# Altium PCB PCB7_main_board.PcbDoc (part 3 of 3)
Units mm, origin at the board's own origin, x right, y up, seen from the top; angles counter-clockwise.
Board outline 169 x 112 mm, 2 copper layers (Top Layer, Bottom Layer); 275 components, 203 nets, 880 pads, 376 vias.
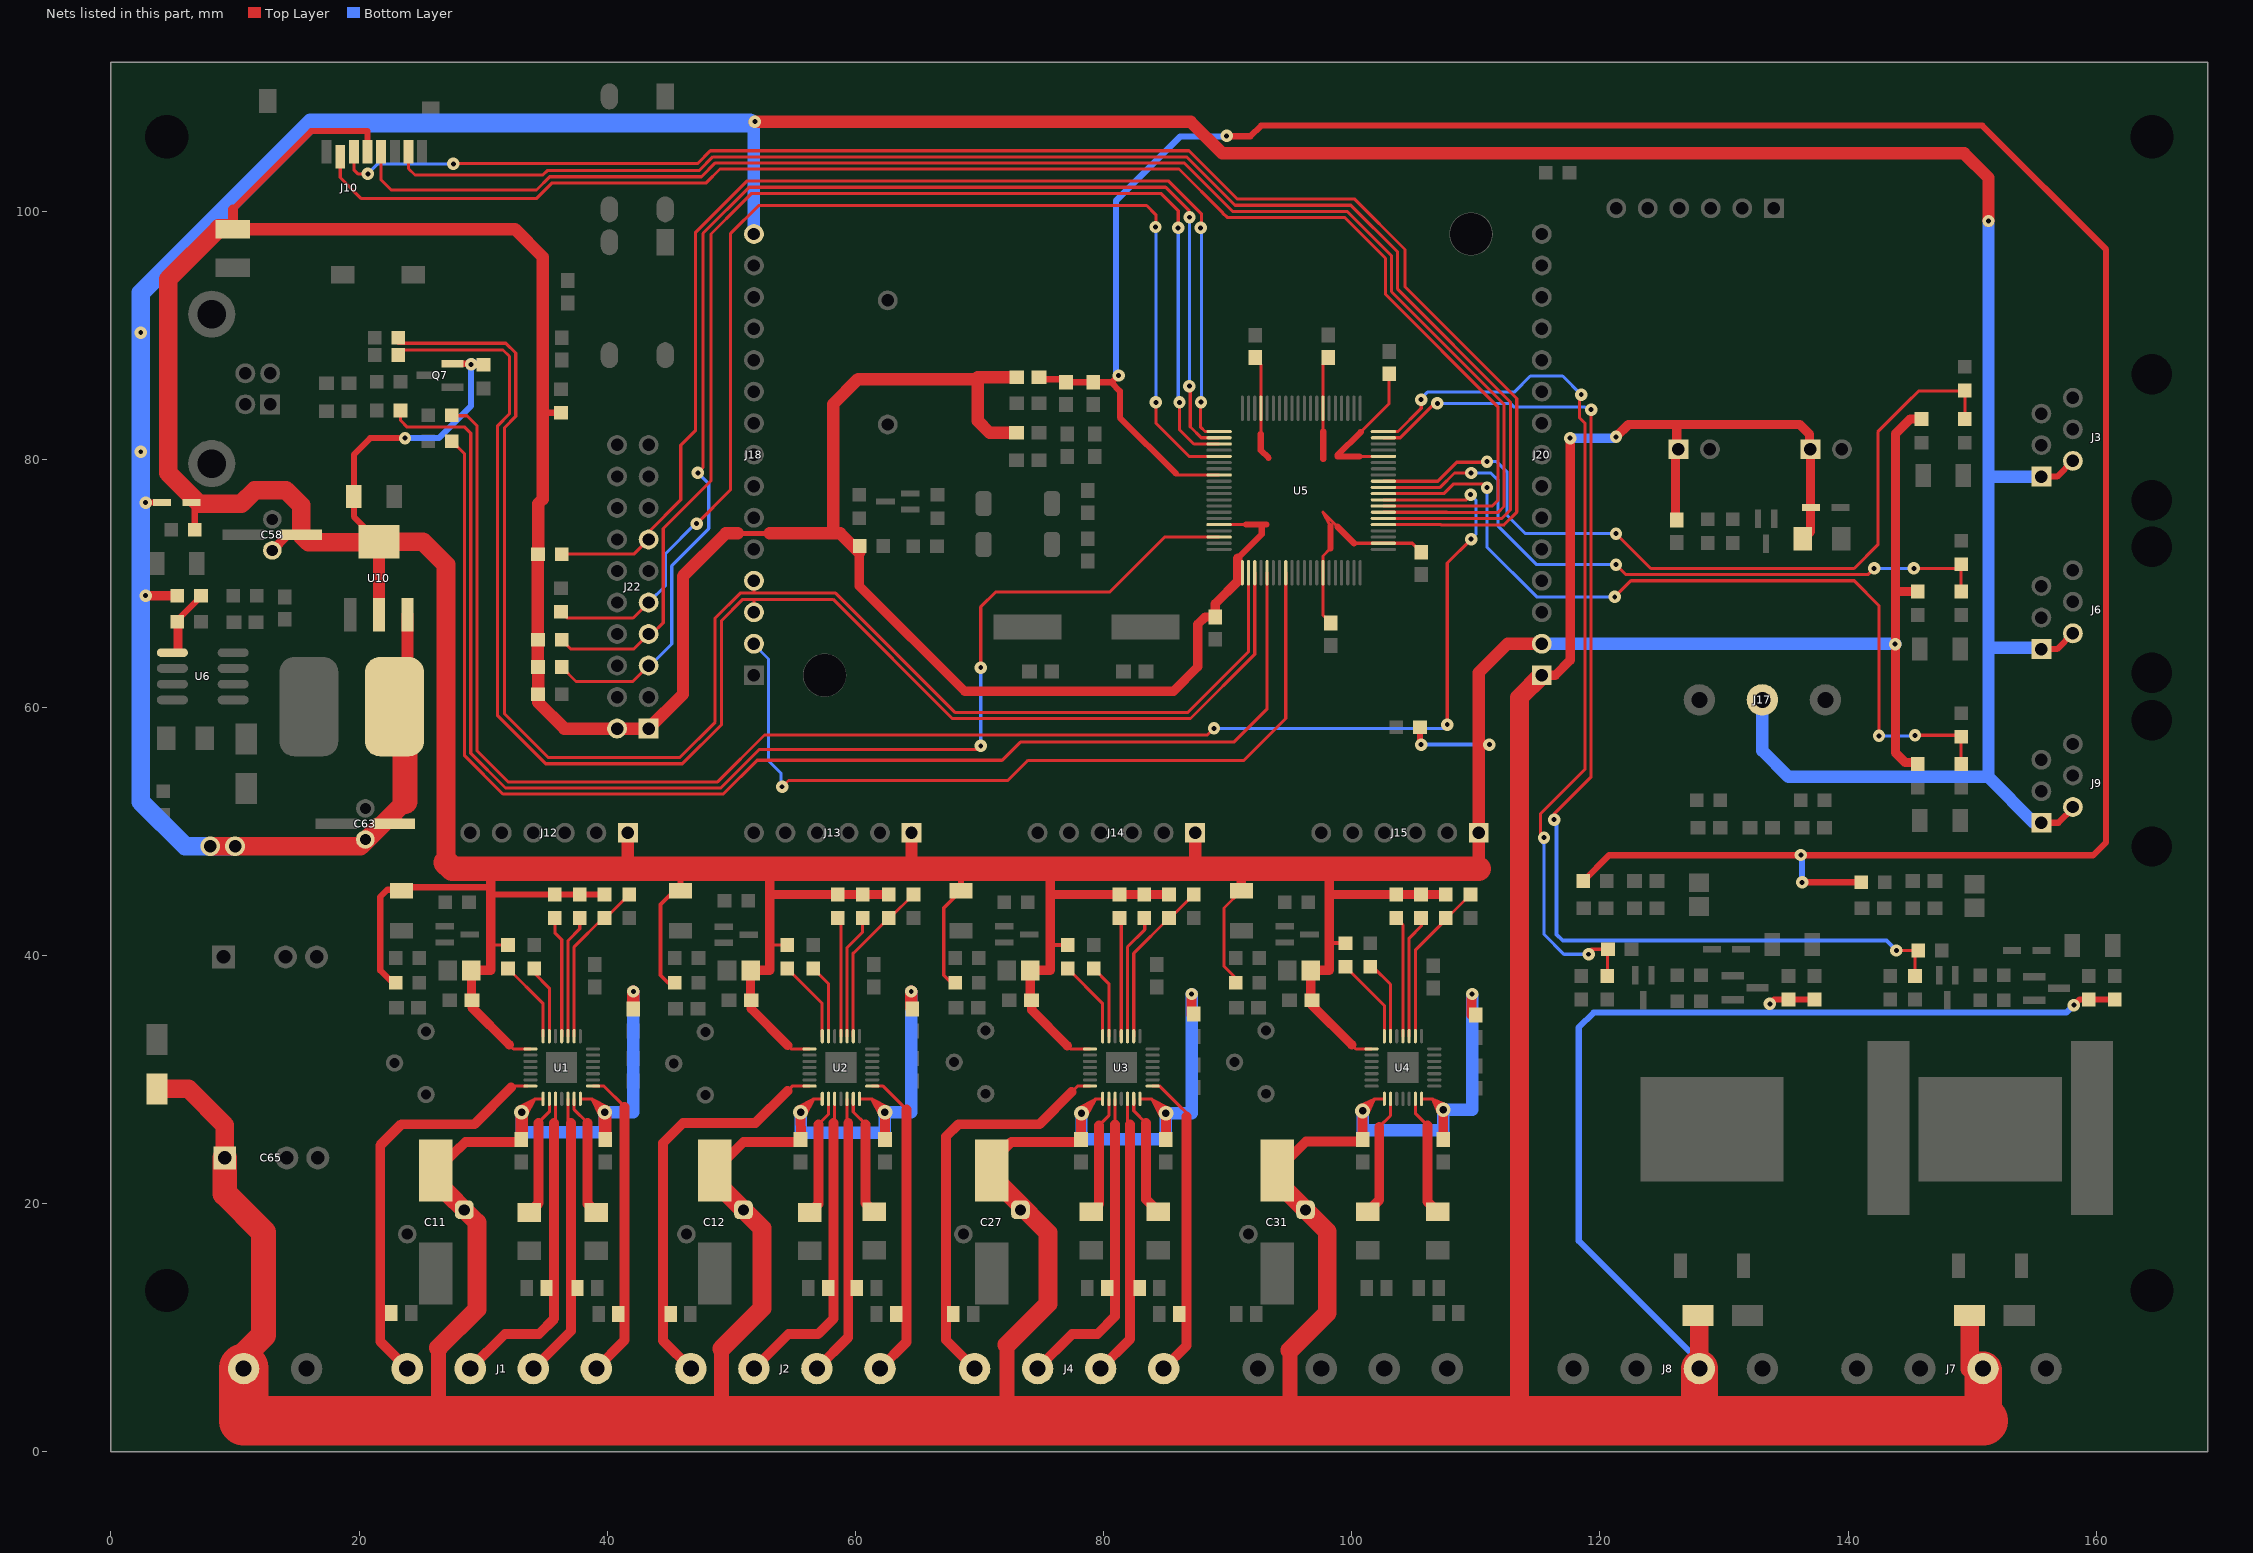
[diagram p3: the nets of this part, all layers, seen from the top]

## Via types
v1: diameter 1, hole 0.4, Top Layer to Bottom Layer, 252 vias
v2: diameter 1.2, hole 0.6, Top Layer to Bottom Layer, 59 vias
v3: diameter 1, hole 0.4, Top Layer to Bottom Layer, tented top, 36 vias
v4: diameter 1.6, hole 0.6, Top Layer to Bottom Layer, 27 vias
v5: diameter 1.6, hole 1, Top Layer to Bottom Layer, 2 vias

## Nets (pads, with @x,y where several pads share a name; then routed paths per layer and width w, separated by ;. In a path a pad name is that pad's centre, name@x,y a point inside that pad or via, vN(x,y) a via of type N, cw(c..) or ccw(c..) an arc to the next point about the centre after c; other vN are vias at no path point) (continued)
NetR1_1: R1.1 R28.2 U1.9 | length 13.4
  Top Layer w0.25: U1.9@37.328,33.495 37.328,40.696 39.652,43.02 R1.1@39.778,43.02 39.878,43.02 R28.2@41.778,44.92
NetR2_1: R2.1 U1.10 | length 9.9
  Top Layer w0.25: U1.10@36.828,33.495 36.828,41.196 37.778,42.146 R2.1@37.778,43.02
NetR3_1: R3.1 U1.11 | length 9.8
  Top Layer w0.25: R3.1@35.778,43.02 35.778,41.83 36.328,41.28 U1.11@36.328,33.495
NetR6_1: R6.1 U1.14 | length 6.6
  Top Layer w0.25: R6.1@32,38.95 34.828,36.122 34.828,35.38 U1.14@34.828,33.495
NetR7_1: R7.1 R29.2 U2.9 | length 13.5
  Top Layer w0.25: U2.9@59.828,33.495 59.82,33.503 59.82,40.188 59.846,40.188 R7.1@62.678,43.02 62.778,43.02 R29.2@64.678,44.92
NetR8_1: R8.1 U2.10 | length 10
  Top Layer w0.25: U2.10@59.328,33.495 59.328,40.648 60.578,41.898 R8.1@60.578,43.02
NetR9_1: R9.1 U2.11 | length 9.6
  Top Layer w0.25: R9.1@58.578,43.02 58.828,42.77 U2.11@58.828,33.495
NetR12_1: R12.1 U2.14 | length 6.6
  Top Layer w0.25: R12.1@54.5,38.95 57.32,36.13 57.32,33.503 U2.14@57.328,33.495
NetR14_1: 
NetR20_2: R20.2 U1.27 | length 9.9
  Top Layer w0.25: U1.27@37.328,28.445 37.328,27.58 38.4,26.508 38.4,26.5
  Top Layer w0.8: 38.4,26.5 38.42,26.48 38.42,19.988 R20.2@39.12,19.288
NetR21_2: R21.2 U1.23 | length 9.6
  Top Layer w0.25: 34.57,26.638 35.328,27.396 U1.23@35.328,28.445
  Top Layer w0.8: R21.2@33.72,19.288 34.47,20.038 34.47,26.5
NetR22_2: R22.2 U2.27 | length 9.8
  Top Layer w0.25: U2.27@59.828,28.445 59.828,27.38 60.82,26.388
  Top Layer w0.8: 60.82,26.388 60.82,20.03 R22.2@61.5,19.35
NetR23_2: R23.2 U2.23 | length 9.8
  Top Layer w0.25: 57.02,26.388 57.828,27.196 U2.23@57.828,28.445
  Top Layer w0.8: R23.2@56.32,19.288 57.02,19.988 57.02,26.388
NetR26_2: R26.2 U1.13 | length 6
  Top Layer w0.25: R26.2@34.1,38.95 34.1,38.6 35.328,37.372 U1.13@35.328,33.495
NetR27_2: R27.2 U2.13 | length 6.1
  Top Layer w0.25: R27.2@56.6,38.95 57.828,37.722 57.828,36.1 ; U2.13@57.828,33.495 57.828,36.1 ; 57.828,36.27 57.828,36.1
NetR30_1: R30.1 R56.2 U3.9 | length 13.5
  Top Layer w0.25: U3.9@82.428,33.495 82.428,40.17 R30.1@85.278,43.02 85.378,43.02 R56.2@87.278,44.92
NetR31_1: R31.1 U3.10 | length 10.1
  Top Layer w0.25: U3.10@81.928,33.495 81.928,40.696 83.32,42.088 83.32,42.978 R31.1@83.278,43.02
NetR32_1: R32.1 U3.11 | length 9.6
  Top Layer w0.25: R32.1@81.278,43.02 81.428,42.87 U3.11@81.428,33.495
NetR35_1: R35.1 U3.14 | length 6.6
  Top Layer w0.25: R35.1@77.1,38.95 79.928,36.122 U3.14@79.928,33.495
NetR36_1: R36.1 R58.2 U4.9 | length 13.3
  Top Layer w0.25: U4.9@105.128,33.495 105.128,40.428 107.578,42.878 R36.1@107.578,43.02 107.678,43.02 R58.2@109.578,44.92
NetR37_1: R37.1 U4.10 | length 10
  Top Layer w0.25: U4.10@104.628,33.495 104.628,41.398 105.62,42.39 105.62,42.978 R37.1@105.578,43.02
NetR38_1: R38.1 U4.11 | length 9.8
  Top Layer w0.25: R38.1@103.578,43.02 104.128,42.47 U4.11@104.128,33.495
NetR41_1: R41.1 U4.14 | length 6.9
  Top Layer w0.25: R41.1@99.5,39.1 102.628,35.972 U4.14@102.628,33.495
NetR44_2: R44.2 R64.2 U5.52 | length 67.6
  Top Layer w0.25: U5.52@102.557,78.226 106.933,78.226 108.46,79.753 v1@110.9,79.753 ; v1(121.3,74) 124.11,71.19 140.49,71.19 142.4,73.1 142.4,82.2 144.7,84.5 ; 145.038,84.838 144.7,84.5 ; R64.2@148.97,85.538 R64.2@149.42,85.538 R44.2@149.42,83.238 ; R64.2@149.4,85.5 145.7,85.5 144.7,84.5
  Bottom Layer w0.25: v1(110.9,79.8) 111.7,79.8 112.5,79 112.5,75.5 114,74 v1(121.3,74)
NetR49_2: R49.2 U3.27 | length 9.9
  Top Layer w0.25: U3.27@82.428,28.445 82.428,27.48 83.42,26.488
  Top Layer w0.8: 83.42,26.488 83.42,20.35 R49.2@84.42,19.35
NetR50_2: R50.2 U3.23 | length 9.7
  Top Layer w0.25: 79.62,26.288 80.428,27.096 U3.23@80.428,28.445
  Top Layer w0.8: R50.2@79.02,19.35 79.62,19.95 79.62,26.288
NetR51_2: R51.2 U4.27 | length 9.8
  Top Layer w0.25: U4.27@105.128,28.445 105.128,27.28 106.12,26.288
  Top Layer w0.8: 106.12,26.288 106.12,20.15 R51.2@106.92,19.35
NetR52_2: R52.2 U4.23 | length 9.9
  Top Layer w0.25: 102.22,26.188 103.128,27.096 U4.23@103.128,28.445
  Top Layer w0.8: R52.2@101.278,19.35 102.22,20.292 102.22,26.188
NetR55_2: R55.2 U3.13 | length 6
  Top Layer w0.25: R55.2@79.2,38.95 80.428,37.722 U3.13@80.428,33.495
NetR57_2: R57.2 U4.13 | length 6.4
  Top Layer w0.25: R57.2@101.5,39.1 101.7,39.1 103.128,37.672 U4.13@103.128,33.495
NetR68_1: R68.1 R70.2 U5.59 | length 93.3
  Top Layer w0.25: U5.59@102.557,81.726 103.919,81.726 106.693,84.5 v1(106.9,84.5) ; v1(116.32,50.948) 116.32,51.42 119.3,54.4 v1(119.3,84) ; v1(143.9,40.4) R68.1@145.65,40.4 145.4,40.15 R70.2@145.4,38.35
  Bottom Layer w0.25: v1(106.9,84.5) 109.7,84.5 112.8,84.5 113.1,84.2 117.8,84.2 118.8,84.2 119,84 v1(119.3,84)
  Bottom Layer w0.3: v1@116.5,50.768 116.5,41.7 117,41.2 143.1,41.2 v1(143.9,40.4)
NetR69_1: R69.1 R92.2 U5.60 | length 72.2
  Top Layer w0.25: U5.60@102.557,82.226 103.726,82.226 105.6,84.1 v1(105.6,84.8) ; v1(115.5,49.5) 115.2,49.8 115.2,51.4 118.8,55 118.8,82.9 118.345,83.355 118.345,85.045 v1(118.5,85.2) ; v1(119.1,40.1) 119.1,40.3 119.3,40.5 120.55,40.5 R69.1@120.6,40.45 ; R92.2@120.6,38.35 R69.1@120.6,40.45 ; R69.1@120.65,40.5 R69.1@120.6,40.45
  Bottom Layer w0.25: v1@105.6,84.9 106.1,85.4 113.1,85.4 114.4,86.7 117,86.7 v1(118.5,85.2) ; v1@115.235,49.235 115.5,48.97 115.5,41.7 117.1,40.1 v1(119.1,40.1)
NetR96_2: R96.2 R97.2 U5.51 | length 55.2
  Top Layer w0.25: U5.51@102.557,77.726 107.126,77.726 108.288,78.888 v1(109.62,78.888) ; v1(121.3,71.5) 122.1,70.7 141.6,70.7 v1(142.1,71.2) ; v1(145.3,71.2) 148.782,71.2 R97.2@149.12,71.538 R96.2@149.12,69.338
  Bottom Layer w0.25: v1(109.62,78.888) 111.212,78.888 111.8,78.3 111.8,74.6 114.9,71.5 118.9,71.5 v1(121.3,71.5) ; v1(142.1,71.2) v1(145.3,71.2)
NetR101_1: R101.1 R102.2 U6.5 | length 5.2
  Top Layer w0.5: R102.2@5.35,67.03 7.25,68.93 R101.1@7.25,69
  Top Layer w0.75: R102.2@5.35,66.9 R102.2@5.35,66.95 ; R102.2@5.35,67.03 R102.2@5.35,66.95 ; U6.5@5.4,64.7 5.4,66.9 R102.2@5.35,66.95
NetR103_2: R103.2 R104.2 U5.50 | length 66.8
  Top Layer w0.25: U5.50@102.557,77.226 102.56,77.223 107.423,77.223 108.213,78.013 v1@110.595,78.013 ; v1(121.2,68.9) 122.5,70.2 140.5,70.2 142.5,68.2 v1(142.5,57.7) ; v1(145.4,57.748) 149.01,57.748 R104.2@149.12,57.638 R103.2@149.12,55.438
  Bottom Layer w0.25: v1(110.9,77.708) 110.9,72.9 114.9,68.9 v1@120.8,68.9 ; v1(142.5,57.7) 145.352,57.7 v1(145.4,57.748)
SD_MISO0: J10.7 U5.46 | length 120.1
  Top Layer w0.25: J10.7@23.978,104.77 23.978,103.422 24.5,102.9 34.8,102.9 35.155,103.255 47.397,103.255 48.512,104.37 86.687,104.37 90.589,100.468 99.932,100.468 103.7,96.7 103.7,96.3 ; U5.46@102.557,75.226 102.56,75.223 112.1,75.223 112.76,75.883 112.79,75.913 112.79,84.61 103.697,93.703 103.697,96.3
SD_MOSI0: J10.3 U5.45 | length 127.3
  Top Layer w0.25: J10.3@19.578,104.77 19.578,103.33 19.604,103.304 19.6,103.3 19.9,103 v1(20.7,103) ; v1(27.6,103.8) 27.625,103.825 33,103.825 ; 32.343,103.825 33,103.825 ; U5.45@102.557,74.726 107.175,74.726 ; 107.182,74.733 107.234,74.681 112.252,74.681 112.303,74.733 113.25,75.679 113.302,75.731 113.302,84.898 104.3,93.9 104.3,96.9 100.242,100.958 92.2,100.958 90.792,100.958 86.89,104.86 48.309,104.86 47.274,103.825 33,103.825
  Bottom Layer w0.25: v1(20.7,103) 21.5,103.8 27.7,103.8 v1(27.6,103.8)
SD_SCK0: J10.5 U5.47 | length 121.9
  Top Layer w0.25: J10.5@21.778,104.77 21.778,102.5 22.578,101.7 34.293,101.7 35.358,102.765 47.6,102.765 48.715,103.88 86.484,103.88 90.386,99.978 99.622,99.978 103.207,96.393 103.207,93.5 112.27,84.437 112.27,76.183 111.8,75.713 107.688,75.713 107.675,75.726 U5.47@102.557,75.726
SD_SSEL0: J10.2 U5.48 | length 123.3
  Top Layer w0.25: J10.2@18.478,104.37 18.478,102.7 20.178,101 34.286,101 35.561,102.275 47.975,102.275 49.09,103.39 86.083,103.39 89.615,99.858 89.615,99.835 89.962,99.488 99.412,99.488 102.717,96.183 102.717,93.297 111.78,84.234 111.78,76.676 111.33,76.226 U5.48@102.557,76.226
TCK: J22.9 R83.2 U5.5 | length 98.6
  Top Layer w0.25: R83.2@36.27,67.698 36.768,67.2 42.082,67.2 J22.9@43.33,68.448 ; v1(47.2,74.8) 49.92,77.52 49.92,98.148 ; 49.95,98.2 52.2,100.45 83.473,100.45 84.214,99.709 v1@84.214,98.725 ; v1(84.22,84.588) 84.22,82.894 86.888,80.226 U5.5@89.307,80.226
  Bottom Layer w0.25: J22.9@43.33,68.448 43.382,68.5 43.382,68.507 44.7,69.825 44.7,72.4 47.1,74.8 v1(47.2,74.8) ; v1@84.214,84.594 v1@84.214,98.575
  other v1: 84.185,98.711
TDI: J22.5 R75.2 U5.2 | length 108.2
  Top Layer w0.25: R75.2@36.32,63.248 37.48,62.088 42.05,62.088 J22.5@43.33,63.368 ; v1(47.3,78.9) 47.72,79.32 47.72,98.199 51.441,101.92 85.003,101.92 86.9,100.023 v1@86.9,99.5 ; 86.985,82.618 v1@86.985,85.823 ; 87,82.6 87.874,81.726 U5.2@89.307,81.726 ; U5.2@88.367,81.726 U5.2@89.307,81.726 ; U5.2@89,81.726 U5.2@89.307,81.726
  Bottom Layer w0.25: J22.5@43.33,63.368 43.468,63.368 45.2,65.1 45.2,71.4 47.787,73.987 ; v1(47.3,78.9) 48.175,78.025 48.175,74.4 47.775,74 ; v1(86.92,85.888) v1@86.92,99.495
  other v1: 86.925,99.5
TDO: J22.13 R86.2 U5.1 | length 96.2
  Top Layer w0.25: R86.2@36.32,72.348 42.13,72.348 42.17,72.388 43.31,73.528 43.33,73.528 43.33,74.13 45.925,76.725 45.925,81.125 47.12,82.32 47.12,98.292 51.238,102.41 85.265,102.41 87.885,99.79 v1@87.885,98.675 ; v1(87.854,84.599) 87.831,84.599 v1@87.82,84.588 ; v1@87.885,84.653 87.842,84.61 v1@87.82,84.588 ; U5.1@89.307,82.226 88.174,82.226 87.825,82.575 87.825,83.575 87.82,83.575 v1@87.82,84.588
  Bottom Layer w0.25: v1@87.885,84.653 v1@87.885,98.55
  other v1: 87.829,98.649
TMS: J22.7 R77.2 U5.3 | length 103.2
  Top Layer w0.25: R77.2@36.32,65.448 37.08,64.688 42.11,64.688 43.33,65.908 43.608,65.908 44.51,66.81 44.51,74.41 48.362,78.262 48.362,98.148 50.757,100.543 51.249,101.035 51.644,101.43 84.62,101.43 86.02,100.03 v1@86.02,98.649 ; v1(86.12,84.588) 86.12,83.7 86.125,83.7 86.125,82.375 87.274,81.226 U5.3@89.307,81.226
  Bottom Layer w0.25: v1@86.02,98.55 86.02,84.588 v1(86.12,84.588)
  other v1: 86.003,98.649
USB_CONNECT: R76.2 U5.49 | length 136.2
  Top Layer w0.25: R76.2@27.47,83.548 27.518,83.5 28.7,83.5 29.5,82.7 29.5,56.493 32,53.993 48.893,53.993 52.665,57.765 88.365,57.765 v1(88.9,58.3) ; U5.49@102.557,76.726 109.258,76.726 ; v1(107.7,58.6) 107.7,71.63 v1(109.62,73.55)
  Bottom Layer w0.25: v1(88.9,58.3) 107.7,58.3 v1(107.7,58.6) ; v1(109.62,73.55) 110,73.93 110,76.708 v1@109.62,77.088
  other v1: 109.58,77.148
USB_D_N: J18.3 R90.2 U5.23 | length 125.5
  Top Layer w0.25: R90.2@23.15,88.4 23.55,88.8 31.6,88.8 32.116,88.284 32.116,83.657 31.164,82.705 31.164,59.323 35.035,55.452 46.052,55.452 49.2,58.6 49.2,66.987 50.913,68.7 51.8,68.7 ; J18.3@51.82,67.668 51.82,68.68 51.8,68.7 ; U5.23@92.182,70.851 92.182,67.718 92.186,67.714 92.186,64.691 92.186,64.273 87.009,59.096 67.804,59.096 58.2,68.7 51.8,68.7
USB_D_P: J18.4 R91.2 U5.22 | length 124.9
  Top Layer w0.25: R91.2@23.15,89.8 23.15,89.348 31.827,89.348 32.62,88.555 32.62,83.448 31.72,82.548 31.72,59.48 35.244,55.956 45.844,55.956 48.696,58.809 48.696,67.196 50.704,69.204 52.864,69.204 58.409,69.204 68.013,59.6 86.8,59.6 91.682,64.482 U5.22@91.682,70.851 ; 51.8,69.204 51.82,69.224 J18.4@51.82,70.208
USB_PWR: J18.2 U5.28 | length 67
  Top Layer w0.25: v1@54.1,53.7 v1(54.1,53.6) 54.608,54.108 72.275,54.108 73.847,55.68 73.897,55.73 91.312,55.73 94.658,59.076 94.658,59.1 ; 94.682,59.1 U5.28@94.682,70.851
  Bottom Layer w0.25: J18.2@51.82,65.128 51.796,65.104 51.8,65.1 53,63.9 53,55.7 54,54.7 v1@54,53.8
USB_UP_LED: R93.1 U5.25 | length 105.5
  Top Layer w0.25: R93.1@27.47,81.448 28.5,80.418 28.5,56.1 31.587,53.013 49.356,53.013 52.078,55.735 71.823,55.735 73.288,57.2 90.5,57.2 93.182,59.882 U5.25@93.182,70.851
USB_VBUS: R89.2 U5.18 | length 109.1
  Top Layer w0.25: R89.2@23.33,83.92 23.33,83.138 23.88,82.588 28.512,82.588 29,82.1 29,75.1 29,56.3 31.797,53.503 49.153,53.503 52.25,56.6 69.8,56.6 v1(70.1,56.9) ; v1(70.1,63.2) 70.1,68.1 71.3,69.3 80.5,69.3 84.926,73.726 U5.18@89.307,73.726
  Bottom Layer w0.25: v1(70.1,56.9) v1(70.1,63.2)
V3.3: C3.2 C4.2 C5.2 C6.2 C21.2 C22.2 C23.2 C24.2 C43.2 C44.2 C45.1 C46.1 C47.1 C48.1 C57.2 C58.1 D2.2 D3.2 D5.2 D6.2 D10.2 D19.2 J10.4 J12.1 J13.1 J14.1 J15.1 J20.2 J22.1 J22.2 L5.1 L7.1 Q7.2 R1.2 R2.2 R3.2 R6.2 R7.2 R8.2 R9.2 R12.2 R13.2 R15.2 R18.2 R19.2 R30.2 R31.2 R32.2 R35.2 R36.2 R37.2 R38.2 R41.2 R42.2 R45.2 R47.2 R48.2 R72.1 R74.2 R75.1 R77.1 R85.2 R86.1 R98.2 R115.1 U1.15 U2.15 U3.15 U4.15 U5.16 U5.21 U5.34 U5.42 U5.56 U5.67 U5.77 U10.2 | length 712
  Top Layer w0.25: 30.6,40.8 30.65,40.85 R6.2@32,40.85 ; 32.1,32.8 32.43,32.47 U1.15@33.803,32.47 ; 53.1,40.8 53.1,40.85 R12.2@54.5,40.85 ; 54.55,32.75 54.83,32.47 U2.15@56.303,32.47 ; R7.2@62.478,44.92 R7.2@62.578,44.82 ; 77.08,32.72 77.33,32.47 U3.15@78.903,32.47 ; R30.2@85.078,44.92 R30.2@85.178,44.82 ; U5.16@89.307,74.726 91.5,74.726 ; R48.2@90.65,37.8 90.65,38.184 89.7,39.134 89.7,43.825 D6.2@91.1,45.225 ; C45.1@92.2,88 C45.1@92.2,88.125 ; C45.1@92.22,88.188 92.225,88.183 92.2,88.158 C45.1@92.2,88.125 ; 92.675,82.025 92.682,82.032 U5.77@92.682,84.101 92.682,87.643 C45.1@92.2,88.125 ; 97.682,82.243 U5.67@97.682,84.101 97.682,87.64 98.171,88.129 C48.1@98.1,88.2 ; 98.282,72.8 97.682,72.2 U5.34@97.682,70.851 97.682,67.418 98.2,66.9 97.891,66.591 C47.1@98.3,66.8 ; 98.282,74.6 97.682,75.726 98.854,74.554 ; 100,32.8 100.33,32.47 U4.15@101.603,32.47 ; 100.182,73.226 U5.42@102.557,73.226 104.874,73.226 C44.2@105.6,72.5 ; 100.62,80.226 U5.56@102.557,80.226 ; 100.72,82.188 103.02,84.488 C46.1@103.02,86.888 ; R36.2@107.378,44.92 R36.2@107.478,44.82
  Top Layer w0.3: R19.2@45.45,37.8 44.9,37.8 44.295,38.405 44.295,44.11 D3.2@45.9,45.715 ; R47.2@68.05,37.8 67.72,37.8 67.11,38.41 67.11,43.835 D5.2@68.5,45.225 ; 75.7,40.8 75.75,40.85 R35.2@77.1,40.85 ; 98.2,41 R41.2@99.5,41 ; 110.24,57 v1(111.1,57)
  Top Layer w0.4: 50.525,74.025 53.1,74.025
  Top Layer w0.5: D19.2@6.475,76.5 6.75,76.225 R98.2@6.75,74.3 ; 9.82,100.12 16.148,106.448 20.678,106.448 J10.4@20.678,104.77 ; U10.2@21.6,73.35 19.575,75.375 D10.2@19.575,77 19.575,80.375 20.9,81.7 v1(23.7,81.7) ; R18.2@22.95,37.8 22.7,37.8 21.7,38.8 21.7,44.725 22.275,45.3 23.02,45.3 23.4,44.92 D2.2@23.4,45.225 23.4,45.5 30.6,45.5 ; Q7.2@27.52,87.698 28.97,87.698 v1(29.02,87.648) 29.068,87.6 30,87.6 R15.2@30.02,87.598 ; 30.6,44.92 R3.2@35.778,44.92 R2.2@37.778,44.92 R1.2@39.778,44.92 ; 34.67,83.738 34.8,83.738 R74.2@36.27,83.738 ; D3.2@45.9,45.715 45.9,46.988 ; D5.2@68.5,45.225 68.5,46.988 ; 90.825,72.025 92.75,73.95 92.75,74.726 ; 91.5,74.726 92.75,74.726 ; 92.675,82.025 92.675,80.725 93.3,80.1 ; 93.125,74.726 92.75,74.726 ; 97.7,80.018 97.7,82.225 ; 98.282,72.8 98.282,74.6 ; 98.854,74.554 100.182,73.226 ; 100.62,80.226 98.842,80.226 98.842,80.31 100.72,82.188 ; R115.1@105.5,58.4 105.5,57.1 v1(105.6,57)
  Top Layer w0.75: C58.1@13,72.65 14.25,73.9 C58.1@15.325,73.9 ; C3.2@29.05,36.45 C4.2@29.05,38.8 30.6,38.8 30.6,40.1 30.6,40.8 30.6,44.92 30.6,45.5 30.6,46.988 ; C3.2@29.1,36.4 29.1,35.8 32.1,32.8 ; 53.1,40.8 53.1,38.8 51.55,38.8 51.55,36.45 C5.2@51.6,36.4 51.6,35.7 54.55,32.75 ; 53.1,40.85 53.1,44.92 ; 53.1,46.988 53.1,44.92 ; 60.315,72.385 60.315,69.785 68.8,61.3 85.632,61.3 87.6,63.268 87.6,66.7 88.188,67.288 C43.2@89,67.288 89,68.35 90.825,70.175 90.825,72.025 ; R7.2@62.678,44.92 62.478,44.92 R8.2@60.578,44.92 R9.2@58.578,44.92 53.1,44.92 ; 75.7,46.988 75.7,44.92 ; 77.08,32.72 74.2,35.6 C21.2@74.2,36.4 74.1,36.5 C22.2@74.1,38.8 75.7,38.8 75.7,40.8 75.7,44.92 ; R30.2@85.278,44.92 85.078,44.92 R31.2@83.278,44.92 R32.2@81.278,44.92 75.7,44.92 ; D6.2@91.1,45.225 91.1,46.988 ; 98.2,46.988 98.2,44.92 ; 100,32.8 96.8,36 C23.2@96.8,36.4 96.7,36.4 C24.2@96.7,38.8 98.2,38.8 98.2,41 98.2,44.92 ; R36.2@107.578,44.92 107.378,44.92 R37.2@105.578,44.92 R38.2@103.578,44.92 98.2,44.92 ; 143.82,81.048 143.82,80.02 ; 143.83,69.338 R42.2@145.62,69.338 ; R45.2@145.62,55.438 145.51,55.548 144.62,55.548 143.82,56.348 143.82,80.02 ; R13.2@145.92,83.238 145.01,83.238 143.82,82.048 143.82,80.02
  Top Layer w0.8: C57.2@9.82,98.538 9.82,100.12
  Top Layer w1: C57.2@10.738,98.538 32.562,98.538 34.8,96.3 34.8,83.738 34.8,76.778 34.42,76.398 R86.1@34.42,72.348 ; U10.2@21.6,67.45 U10.2@21.6,73.3 ; R75.1@34.4,63.1 R75.1@34.4,63.248 ; R86.1@34.4,72.2 R77.1@34.4,65.448 ; R77.1@34.42,65.448 R77.1@34.4,65.448 ; 41.66,47.628 J12.1@41.66,49.888 ; 50.525,74.025 49.55,74.025 46.1,70.575 46.1,61.058 43.33,58.288 36.542,58.288 34.42,60.41 R72.1@34.42,61.048 R75.1@34.42,63.248 R75.1@34.4,63.248 ; 53.1,74.025 58.2,74.025 ; R85.2@60.3,73 R85.2@60.35,73 ; R85.2@60.315,72.485 58.775,74.025 58.2,74.025 ; 64.52,47.688 J13.1@64.52,49.888 ; 69.874,86.6 L7.1@72.882,86.6 ; L5.1@72.982,82.126 70.826,82.126 69.874,83.079 69.874,86.45 60.222,86.45 58.2,84.428 58.2,74.025 ; 87.38,47.628 J14.1@87.38,49.888 ; 110.24,46.988 110.24,57 110.24,62.8 112.568,65.128 J20.2@115.32,65.128 ; R75.1@34.4,63.248 R77.1@34.4,65.448
  Top Layer w1.5: D19.2@6.737,76.762 4.6,78.9 4.6,94.5 8.7,98.6 C57.2@9.7,98.6 ; D19.2@7.1,76.4 10.5,76.4 11.6,77.5 14.1,77.5 15.325,76.275 C58.1@15.325,73.9 15.925,73.3 U10.2@21.6,73.3 ; U10.2@21.6,73.35 25.15,73.35 27,71.5 27,47.5
  Top Layer w2: 27,47.5 27.512,46.988 30.6,46.988 45.9,46.988 53.1,46.988 75.7,46.988 91.1,46.988 98.2,46.988 110.24,46.988
  Bottom Layer w0.3: v1(105.6,57) v1(111.1,57)
  Bottom Layer w0.5: v1(23.7,81.7) 26.412,81.7 29.02,84.308 v1(29.02,87.648) ; J12.1@41.66,49.888 J12.1@41.78,50.008
  Bottom Layer w1: v1(29.02,87.648) v1@29.022,87.646 ; J22.1@43.17,58.128 J22.1@43.33,58.288 ; J20.2@115.32,65.128 143.8,65.128 v1(143.8,65.1)
V5: C63.1 D19.1 J3.1 J3.2 J6.1 J6.2 J9.1 J9.2 J17.2 J18.15 L13.2 R101.2 U10.3 | length 348.7
  Top Layer w0.5: v1(2.8,76.5) D19.1@4.125,76.5 ; J6.1@155.583,64.695 156.853,64.695 J6.2@158.123,65.965 ; J3.1@155.583,78.595 156.853,78.595 J3.2@158.123,79.865 ; J9.1@155.683,50.695 156.953,50.695 158.223,51.965 J9.2@158.123,51.965
  Top Layer w0.75: v1(2.8,69) 3.8,69 R101.2@5.35,69
  Top Layer w1: C63.1@21,49.35 22.35,50.7 C63.1@23.1,50.7 ; L13.2@23.9,61.2 U10.3@23.9,67.45 ; v1(51.9,107.2) 87.02,107.2 89.572,104.648 149.352,104.648 151.319,102.681 v1(151.319,99.2)
  Top Layer w1.5: v5(8,48.8) v5(10,48.8) 20.1,48.8 23.7,52.4
  Top Layer w2: L13.2@22.85,60.05 23.7,59.2 23.7,52.4
  Bottom Layer w0.5: 151.3,54.4 151.32,54.38 ; 151.319,83.401 151.32,83.4 ; J9.1@155.005,50.695 J9.1@155.583,50.695 ; J6.1@155.478,64.8 J6.1@155.583,64.695
  Bottom Layer w0.75: v1@2.4,69.1 2.5,69 v1(2.8,69)
  Bottom Layer w1: J18.15@51.82,98.148 v1@51.82,107.14 ; J17.2@133.1,60.6 133.1,56.5 135.2,54.4 151.3,54.4 ; 151.319,83.401 v1(151.319,99.2) ; 151.32,83.4 151.32,54.38 J9.1@155.005,50.695 ; 151.345,64.8 J6.1@155.478,64.8 ; 151.35,78.595 J3.1@155.583,78.595
  Bottom Layer w1.5: v5(10,48.8) v5(8,48.8) 6,48.8 2.4,52.4 2.4,69.1 2.4,93.4 16.1,107.1 v1@51.5,107.1
  other v1: 2.4,80.6 2.4,90.2
VA3.3: C53.2 C54.2 L7.2 R59.2 R60.2 U5.8 | length 218.5
  Top Layer w0.25: 85.8,78.9 85.853,78.847 ; 85.83,78.848 85.853,78.847 ; U5.8@89.307,78.726 85.974,78.726 85.853,78.847
  Top Layer w0.5: L7.2@74.832,86.45 C53.2@76.968,86.45 ; C53.2@77.032,86.2 79.232,86.2 80.32,86.2 80.608,86.2 81.32,85.488 81.32,83.359 85.789,78.889 85.83,78.848 ; 80.672,86.2 v1(81.22,86.748) ; v1@89.913,106.008 89.939,106.034 91.834,106.034 92.69,106.89 150.81,106.89 160.8,96.9 160.8,49.13 159.755,48.085 120.735,48.085 R60.2@118.65,46 ; v1(89.913,106.06) 89.96,106.06 89.96,106.1 v1@89.913,106.1 ; v1(136.3,45.9) R59.2@141.07,45.9
  Bottom Layer w0.5: v1@81,86.968 81,100.828 86.18,106.008 89.555,106.008 89.647,106.1 89.96,106.1 89.96,106.06 v1(89.913,106.06) ; v1(136.2,48.1) 136.3,48.1 v1(136.3,45.9)
VMM: C7.1 C8.2 C9.2 C10.2 C11.1 C12.1 C13.2 C14.2 C25.2 C26.2 C27.1 C28.2 C29.2 C30.2 C31.1 C32.2 C41.2 C62.2 C65.1 D11.1 D15.1 D16.1 D20.1 J7.3 J8.3 J20.1 J21.1 J23.1 J24.1 R43.2 R66.2 R67.2 R106.2 U1.22 U1.28 U2.22 U2.28 U3.22 U3.28 U4.22 U4.28 | length 715.2
  Top Layer w0.25: v2@32.818,27.757 34.195,28.445 ; v2@32.949,27.542 34.195,28.445 ; v2(33.094,27.37) 34.195,28.445 ; v2@33.12,27.37 34.195,28.445 ; v2@33.262,27.22 34.195,28.445 ; v2@33.474,27.085 34.195,28.445 ; U1.22@34.828,28.445 34.195,28.445 ; U1.28@37.828,28.445 38.744,28.445 ; v2@39.413,27.095 38.744,28.445 ; v2@39.628,27.225 38.744,28.445 ; v2(39.8,27.37) 38.744,28.445 ; v2@39.809,27.379 38.744,28.445 ; v2@39.948,27.539 38.744,28.445 ; v2@40.082,27.752 38.744,28.445 ; v2@55.299,27.754 56.653,28.445 ; v2@55.431,27.54 56.653,28.445 ; v2(55.578,27.37) 56.653,28.445 ; v2@55.6,27.392 56.653,28.445 ; v2@55.748,27.223 56.653,28.445 ; v2@55.962,27.091 56.653,28.445 ; U2.22@57.328,28.445 56.653,28.445 ; U2.28@60.328,28.445 61.303,28.445 ; v2@61.903,27.37 ccw(c60.756,27.37) 61.567,28.181 ccw(c62.378,28.992) v2@62.378,27.845 ; v2@61.994,27.091 61.303,28.445 ; v2@62.208,27.223 61.303,28.445 ; v2@62.525,27.54 61.303,28.445 ; v2@62.657,27.754 61.303,28.445 ; v2@77.938,27.67 79.35,28.418 ; v2@78.072,27.458 79.35,28.418 ; v2(78.22,27.288) 79.377,28.445 U3.22@79.928,28.445 ; v2@78.39,27.14 79.35,28.418 ; v2@78.602,27.006 79.35,28.418 ; U3.28@82.928,28.445 83.863,28.445 v2(85.02,27.288) 83.89,28.418 ; v2@84.638,27.006 83.89,28.418 ; v2@84.85,27.14 83.89,28.418 ; v2@85.167,27.458 83.89,28.418 ; v2@85.302,27.67 83.89,28.418 ; v2@100.605,27.859 101.853,28.445 ; v2@100.732,27.642 101.853,28.445 ; v2(100.878,27.47) 101.853,28.445 ; v2@101.05,27.324 101.853,28.445 ; v2@101.267,27.197 101.853,28.445 ; U4.22@102.628,28.445 101.853,28.445 ; U4.28@105.628,28.445 106.503,28.445 ; v2@106.984,27.305 106.503,28.445 ; v2@107.205,27.426 106.503,28.445 ; v2@107.522,27.743 106.503,28.445 ; v2@107.643,27.964 106.503,28.445 ; 61.303,28.445 v2(62.378,27.37) 61.303,28.445 ; 106.503,28.445 v2(107.378,27.57) 106.503,28.445
  Top Layer w0.5: C62.2@126.2,75.1 C62.2@126.33,75.23 ; J21.1@126.33,80.66 J21.1@126.33,80.8 J21.1@126.365,80.835 ; v1(133.7,36.1) 134.05,36.45 R43.2@135.2,36.45 R67.2@137.3,36.45 ; C41.2@136.35,73.6 C41.2@136.375,73.625 ; J24.1@136.935,80.835 J24.1@136.97,80.8 ; D20.1@136.97,76.155 D20.1@137.025,76.1 C41.2@137.025,74.275 ; v1(158.2,36) 158.65,36.45 R106.2@159.4,36.45 R66.2@161.5,36.45
  Top Layer w0.75: J20.1@115.32,62.588 115.329,62.597 116.397,62.597 117.6,63.8 v1(117.6,81.7) ; v1(121.3,81.8) 122.3,82.8 126.2,82.8 ; C62.2@126.1,75.1 126.1,80.43 J21.1@126.33,80.66 ; J21.1@126.2,81 126.2,82.8 ; C41.2@136.4,73.6 136.97,74.17 136.97,76.155 J24.1@136.97,80.8 ; J24.1@136.9,80.8 136.9,82 136.1,82.8 126.2,82.8
  Top Layer w0.8: C11.1@26.178,22.67 C11.1@26.204,22.696 ; C11.1@26.2,22.7 28.57,24.97 C8.2@32.978,24.97 ; C12.1@48.678,22.67 50.968,24.96 C9.2@55.36,24.96 ; v2(55.578,27.37) C9.2@55.6,25.2 ; C27.1@71.378,23.778 72.56,24.96 77.968,24.96 C25.2@78.178,25.17 v2@78.178,27.246 ; v1(87.1,36.9) 87.1,35.188 87.196,35.188 C30.2@87.278,35.27 ; C31.1@93.978,22.67 96.308,25 100.878,25 C29.2@100.878,25.17 ; v1(109.7,36.9) 109.7,36.668 109.66,36.628 109.66,35.188 C32.2@110,35.2 ; C29.2@100.878,25.17 v2(100.878,27.47) C29.2@100.878,25.17 ; C10.2@62.378,25.17 v2(62.378,27.37) C10.2@62.378,25.17 ; C26.2@85.02,25.288 v2(85.02,27.288) C26.2@85.02,25.288 ; C28.2@107.378,25.27 v2(107.378,27.57) C28.2@107.378,25.27
  Top Layer w1: 26.4,3.8 26.6,3.6 ; v2(33.094,27.37) 33.12,25.212 v2@33.12,27.37 ; v2(39.8,27.37) C7.1@39.828,25.17 39.828,27.361 v2@39.809,27.379 ; C13.2@42.1,35.7 v1(42.1,37.1) ; v1(64.5,37.1) 64.5,35.778 C14.2@64.578,35.7
  Top Layer w1.2: 26.4,3.8 26.4,8.4 ; 49.22,3.338 49.22,8.32 ; 72.22,3.188 72.22,8.62 ; 95,2.5 95.02,2.52 95.02,8.188
  Top Layer w1.5: D11.1@3.72,29.248 6.252,29.248 9.17,26.33 C65.1@9.17,23.688 ; C11.1@26.178,22.67 26.178,21.8 29.5,18.478 29.5,11.5 26.4,8.4 ; C12.1@48.678,22.67 48.678,21.8 52.47,18.008 52.47,11.57 49.22,8.32 ; C27.1@71.378,23.778 71.378,21.8 73.678,19.5 74.639,18.539 75.52,17.658 75.52,11.92 72.22,8.62 ; C31.1@93.978,22.67 93.978,21.8 98.02,17.758 98.02,11.188 95.02,8.188 ; 113.52,3.288 113.52,60.788 J20.1@115.32,62.588 ; J8.3@128.02,6.708 D15.1@128.02,11 ; D16.1@149.8,11 149.8,6.708 J7.3@150.692,6.708 ; J7.3@150.8,6.6 J7.3@150.692,6.708 ; J7.3@150.88,6.708 J7.3@150.692,6.708
  Top Layer w2: C65.1@9.17,23.688 9.17,20.83 12.3,17.7 12.3,9.4 10.7,7.8 J23.1@10.7,6.72
  Top Layer w3: 128.02,2.9 J8.3@128.02,6.708 ; J7.3@150.8,6.6 150.9,6.6 150.9,2.5
  Top Layer w4: J23.1@10.7,6.72 10.7,2.5 95,2.5 150.9,2.5
  Bottom Layer w0.5: J8.3@128.02,6.708 128.02,7.28 118.3,17 118.3,34.2 119.5,35.4 157.6,35.4 v1(158.2,36) ; v1@133.7,35.6 v1(133.7,36.1)
  Bottom Layer w0.75: v1(117.6,81.7) 121.2,81.7 v1(121.3,81.8)
  Bottom Layer w0.8: v1(109.7,36.9) v1@109.7,36.768 ; v1@109.7,36.768 109.7,36.668 109.8,36.768 v1@109.7,36.768
  Bottom Layer w1: v2(33.094,27.37) 33.12,25.77 39.8,25.77 v2@39.8,27.3 ; v2(39.8,27.37) 42.1,27.37 v1(42.1,37.1) ; v2@62.3,27.292 v2(62.378,27.37) ; v1(64.5,37.1) 64.5,27.37 v2(62.378,27.37) ; v2@78.178,27.246 v2(78.22,27.288) 78.22,25.28 78.3,25.2 85.02,25.2 v2(85.02,27.288) 87.1,27.288 v1(87.1,36.9) ; v2(100.878,27.47) 100.878,25.9 107.378,25.9 v2(107.378,27.57) 109.7,27.57 v1@109.7,36.668 ; 55.578,25.7 v2(55.578,27.37) 55.578,25.7 ; 55.578,25.7 62.378,25.7 v2(62.378,27.37)
X5V: 
X_MOTOR_1A: J1.2 R40.1 U1.24 | length 26
  Top Layer w0.25: 35.82,26.688 U1.24@35.828,28.445
  Top Layer w0.8: J1.2@28.96,6.708 31.752,9.5 34.5,9.5 35.72,10.72 35.72,26.5
X_MOTOR_1B: J1.1 R34.1 U1.21 | length 34.3
  Top Layer w0.25: 21.7,11.2 R34.1@22.6,11.2 ; 32.37,29.47 U1.21@33.553,29.47 ; 32.478,29.47 U1.21@33.353,29.47
  Top Layer w0.8: J1.1@23.88,6.708 21.7,8.888 21.7,11.2 21.7,24.7 23.4,26.4 29.3,26.4 32.25,29.35
X_MOTOR_2A: J1.3 R78.1 U1.26 | length 23.1
  Top Layer w0.25: U1.26@36.828,28.445 36.828,27.201 36.828,26.742 37.07,26.5
  Top Layer w0.8: J1.3@34.04,6.708 37.07,9.738 37.07,26.5
X_MOTOR_2B: J1.4 R80.1 U1.1 | length 25.3
  Top Layer w0.25: U1.1@38.853,29.47 39.73,29.47 41.4,27.8
  Top Layer w0.8: J1.4@39.12,6.708 41.4,8.988 41.4,27.8
XGND: 
XOUT: 
Y_MOTOR_1A: J2.2 R73.1 U2.24 | length 25.8
  Top Layer w0.25: 58.22,26.488 58.328,26.596 U2.24@58.328,28.445
  Top Layer w0.8: J2.2@51.82,6.708 54.612,9.5 57,9.5 58.22,10.72 58.22,26.488
Y_MOTOR_1B: J2.1 R39.1 U2.21 | length 32.8
  Top Layer w0.25: 54.52,29.088 54.902,29.47 U2.21@56.303,29.47
  Top Layer w0.8: J2.1@46.74,6.708 44.5,8.948 44.5,24.9 46.1,26.5 51.932,26.5 54.52,29.088
Y_MOTOR_2A: J2.3 R79.1 U2.26 | length 22.8
  Top Layer w0.25: U2.26@59.328,28.445 59.328,26.58 59.42,26.488
  Top Layer w0.8: J2.3@56.9,6.708 59.42,9.228 59.42,26.488
Y_MOTOR_2B: J2.4 R81.1 U2.1 | length 25.3
  Top Layer w0.25: U2.1@61.353,29.47 62.23,29.47 64.1,27.6
  Top Layer w0.8: J2.4@61.98,6.708 64.1,8.828 64.1,27.6
Z_MOTOR_1A: J4.2 R109.1 U3.24 | length 25.5
  Top Layer w0.25: 80.92,26.388 80.92,28.437 U3.24@80.928,28.445
  Top Layer w0.8: J4.2@74.68,6.708 77.472,9.5 79.5,9.5 80.92,10.92 80.92,26.388
Z_MOTOR_1B: J4.1 R82.1 U3.21 | length 32.9
  Top Layer w0.25: 77.42,28.988 77.902,29.47 U3.21@78.903,29.47
  Top Layer w0.8: J4.1@69.6,6.708 67.31,8.998 67.31,25.41 68.3,26.4 74.832,26.4 77.42,28.988
Z_MOTOR_2A: J4.3 R111.1 U3.26 | length 22.8
  Top Layer w0.25: U3.26@81.928,28.445 81.928,26.58 82.12,26.388
  Top Layer w0.8: J4.3@79.76,6.708 82.12,9.068 82.12,26.388
Z_MOTOR_2B: J4.4 R113.1 U3.1 | length 25
  Top Layer w0.25: U3.1@83.953,29.47 84.538,29.47 86.067,27.941 86.7,27.308 86.7,27.008
  Top Layer w0.8: J4.4@84.84,6.708 86.7,8.568 86.7,27.008
pads on no net: J3.MH1 J3.MH2 J6.MH1 J6.MH2 J9.MH1 J9.MH2 J10.1 J10.8 J11.5 J11.6 J19.1 J19.2 J19.3 J20.3 J20.4 J20.15 J22.11 J22.17 J22.19 MH1.0 MH2.0 MH3.0 MH4.0 MH5.0 MH6.0 U1.7 U1.20 U1.25 U2.7 U2.20 U2.25 U3.7 U3.20 U3.25 U4.7 U4.20 U4.25 U5.11 U6.2 U6.6 X1.2 X1.3

## Polygon pours and split planes (outlines as drawn)
V3.3 on Top Layer "Top_LPC_Vcc" (solid, pour order 1003): 92.682,80.726 99.258,80.726 99.32,80.788 99.32,74.188 92.52,74.188 92.52,80.688
GND on Top Layer "Top_GND" (solid, remove dead copper, pour order 1005): 113,1 113.1,49.2 164.5,49.2 164.5,101.9 159.9,105.9 159.9,110.5 9.1,110.6 9.1,106.2 4.4,101.4 1.5,101.4 1.5,72.5 28,72.5 28,51.8 22,47 22.1,0.9
GND on Top Layer "Bottom_GND_DCDC" (solid, remove dead copper, pour order 1004): 1.5,47 22.516,47 26.6,51 26.6,72.7 21.221,78.1 1.5,78.1
GND_A on Bottom Layer "Bottom_AnalogGND" (solid, pour order 1001): 92.2,108 92.2,105.5 150.5,105.5 159.5,96.5 159.5,50 158.5,49 116.5,49 116.5,42.3 162,42.3 162,97.5 151.5,108
GND on Bottom Layer "Bottom_GND" (solid, remove dead copper, pour order 1002): 164.5,1 164.5,8.5 162.7,8.5 160.9,10.1 160.9,16.6 148.1,16.6 148.1,4.5 138.1,4.5 138.1,16.6 125.2,16.6 125.2,11.2 129.8,8.3 129.8,4.5 115.9,4.5 116,48.9 164.5,48.9 164.5,101.5 159.8,106.1 159.8,110.5 157,110.5 9.1,110.6 9.1,106.1 4.4,101.2 1.5,101.2 1.5,94 1.4,51.5 3.884,49 11.338,49 12.6,47.8 12.6,23 14.5,21 14.532,8.808 13.5,7.9 13.5,1

## Keep-outs
Keep-Out Layer:
  the board outline again, w0.2

## Other copper
Top Layer:
  rectangle net GND: 152.5,13.2 155.4,16.4
  rectangle net NetD16_2: 142.5,18 160.5,34
  rectangle net NetD15_2: 120,18 138,34
  rectangle net GND: 130.2,13.4 133.1,16.6
  pour cut-out: 126.1,48.6 140.2,48.6 140.2,62.7 126.1,62.7
  pour cut-out: 20.6,27.2 113,27.1 113,4.5 20.5,4.5
  pour cut-out: 113,51.5 26.7,51.5 26.7,47.9 113,47.5
  pour cut-out: 89.3,51.5 89.3,8.5 89.8,8.5 89.8,51.5
  pour cut-out: 66.5,50.9 66.5,7.9 67,7.9 67,50.9
  pour cut-out: 43.5,51.5 43.5,10 44,10 44,51.5
  pour cut-out: 162.2,48.3 158.3,48.4 158.5,48.3 158.4,48.4 159.5,49.521 159.5,96.5 150.5,105.5 87.3,105.5 87.3,108.2 151.49,108.25 162.24,97.5 162.225,97.485 162.1,48.3
  pour cut-out: 120.6,98 120.6,84.6 141.6,84.6 141.6,98
  pour cut-out: -0.2,79.3 5.4,79.3 5.4,78.6 -0.1,78.6
  text "R2C2" at 121,90.8 h10
Bottom Layer:
  rectangle net GND: 151.8,12.4 156.9,16.6
  rectangle net GND: 128.9,12.4 134,16.6
  pour cut-out: 126.1,48.6 140.2,48.6 140.2,62.7 126.1,62.7
  pour cut-out: 26.1,71.1 24.4,72.8 19,72.8 19,72.4 24.2,72.4 25.8,70.8 25.8,49.6 26.1,49.9
  pour cut-out: 26.7,50.7 112.6,50.7 112.5,52 28,52
  pour cut-out: 20.5,10 21,10 21,45.1 20.5,44.7
  pour cut-out: 112,52 117,52 117,3.9 111.9,3.8
  pour cut-out: 89.5,51.6 89.5,10 90,10 90,51.6
  pour cut-out: 67.5,51.6 67.5,10 67,10 67,51.6
  pour cut-out: 20.5,4.5 116.5,4.5 116,5 116,10.5 20.5,10.5
  pour cut-out: 44,49.8 44,51.5 43.6,51.5 43.5,10 44,10
  region net GND: 34,28.5 39,28.5 39,33.5 34,33.5
  region net GND: 56.5,28.5 61,28.5 61,33.5 56.5,33.5
  region net GND: 79,28.5 83.5,28.5 83.5,33 79,33
  region net GND: 102,29 106,29 106,33 102,33

## Silkscreen, mask and mechanical layers (free items; w line width, h text height)
Top Overlay:
  drawing of 6 lines, arcs and shapes, not listed
  text "UART" at 136.8,106.9 h2
  text "Debug" at 136.8,103.5 h2
  text "Boot" at 49.4,101.5 h2 r90
  text "COMPLIANT" at 71.1,99.5 h3
  text "<" at 123.4,99 h1 r270
  text ">" at 125.9,99 h1 r270
  text "E" at 53.2,98 h15
  text "R2C2" at 121,90.8 h10
  text "V1.1P" at 138.239,90.687 h2
  text "Reset" at 49.4,90 h2 r90
  text "Red Edition" at 121,88.819 h2
  text "2011/06" at 136.21,88.8 h2
  text "by FMendes75@gmail.com" at 121,87.5 h1.5
  text "Made in EU" at 144,87 h1.8 r90
  text "www.3dprinting-r2c2.com" at 121,86.1 h1.5
  text "Creative Commons BY-NC-SA" at 121,84.7 h1.5
  text "OptoS-X" at 153.3,77.2 h1.5 r90
  text "USB Con" at 24.5,76.2 h1.8
  text "5V" at 132.1,67.2 h1.2
  text "A-IN" at 136.7,67.2 h1.2
  text "GND" at 125.8,67.1 h1.2
  text "JTAG" at 49.4,66.2 h2 r90
  text "OptoS-Y" at 153.3,63.5 h1.5 r90
  text "GND" at 29.38,52.2 h1.2 r90
  text "Step" at 31.94,52.2 h1.2 r90
  text "Dir" at 34.5,52.2 h1.2 r90
  text "*EN" at 37.06,52.2 h1.2 r90
  text "*RST" at 39.62,52.2 h1.2 r90
  text "3.3v" at 42.18,52.2 h1.2 r90
  text "GND" at 52.24,52.2 h1.2 r90
  text "Step" at 54.8,52.2 h1.2 r90
  text "Dir" at 57.36,52.2 h1.2 r90
  text "*EN" at 59.92,52.2 h1.2 r90
  text "*RST" at 62.48,52.2 h1.2 r90
  text "3.3v" at 65.04,52.2 h1.2 r90
  text "GND" at 75.1,52.2 h1.2 r90
  text "Step" at 77.66,52.2 h1.2 r90
  text "Dir" at 80.22,52.2 h1.2 r90
  text "*EN" at 82.78,52.2 h1.2 r90
  text "*RST" at 85.34,52.2 h1.2 r90
  text "3.3v" at 87.9,52.2 h1.2 r90
  text "GND" at 97.96,52.2 h1.2 r90
  text "Step" at 100.52,52.2 h1.2 r90
  text "Dir" at 103.08,52.2 h1.2 r90
  text "*EN" at 105.64,52.2 h1.2 r90
  text "*RST" at 108.2,52.2 h1.2 r90
  text "3.3v" at 110.76,52.2 h1.2 r90
  text "OptoS-Z" at 153.3,49.2 h1.5 r90
  text "X" at 34.8,38.3 h5
  text "X" at 57.6,38.3 h5
  text "X" at 80.3,38.3 h5
  text "X" at 102.3,38.3 h5
  text "X" at 165,28.5 h5
  text "X" at 165,19.5 h5
  text "X" at 110.4,14.5 h15
  text "CTC1" at 113.8,11.4 h1.4
  text "CTC2" at 137.2,11.4 h1.4
  text "VMM GND" at 9.2,9.5 h1.4
  text "X" at 37.4,9.4 h4
  text "Y" at 59.9,9.4 h4
  text "Z" at 83,9.4 h4
  text "E" at 105.4,9.4 h4
  text "| NTC |   |  RL  |" at 118.2,9.1 h1
  text "| NTC |   |  RL  |" at 140.7,9.1 h1
Top Solder:
  lines w0.25: 38.853,29.47 39.33,29.47 ; 61.353,29.47 61.93,29.47
  lines w1.5: 150.8,6.6 150.692,6.708 150.88,6.708
  lines w3: 150.8,6.6 150.9,6.6
Bottom Solder:
  region: 14.5,9 20.5,9 20.5,4.5 164.5,4.5 164.5,0 14.5,0
  lines w1: 26.5,3.8 26.5,8.5 ; 49.3,3.9 49.3,8.4 ; 72.2,3.8 72.2,8.6 ; 95.1,3.8 95.1,8.3
  lines w1.5: 26.5,8.5 29.3,11.3 ; 49.4,8.4 52.3,11.3 ; 72.2,8.6 75.5,11.9 ; 95.1,8.3 98,11.2
Mechanical 2:
  text "License		Creative Commons BY-NC-SA" at -0.1,-9.7 h5.24
Drill Drawing:
  text ".LEGEND" at 164.758,-0.45 h1
  text "Drill Drawing." at 164.758,-2.99 h1

## Dimensions
169,112 to 169,0 on Mechanical 2
0,112 to 169,112 on Mechanical 2
164.5,106 to 4.5,106 on Mechanical 2
4.5,106 to 4.5,13 on Mechanical 2
0,112 to 0,0 on Mechanical 2
4.5,13 to 0,0 on Mechanical 2
4.5,106 to 0,112 on Mechanical 2
4.5,106 to 0,112 on Mechanical 2
164.5,106 to 169,112 on Mechanical 2

## Text inside footprints (layer, text, board x,y; h text height)
C65: Top Overlay "+" at 3.445,22.938 h1.5
C66: Top Overlay "+" at 3.345,39.138 h1.5
J1: Top Overlay "1" at 20.63,7.458 h1
J2: Top Overlay "1" at 43.49,7.458 h1
J4: Top Overlay "1" at 66.35,7.458 h1
J5: Top Overlay "1" at 89.21,7.458 h1
J7: Top Overlay "1" at 137.47,7.458 h1
J8: Top Overlay "1" at 114.61,7.458 h1
J10: Mechanical 15 "Card Locked Pos." at 18.378,110.37 h1
J17: Top Overlay "1" at 123.8,60.4 h1
J21: Top Overlay "1" at 123.8,80.3 h1
J22: Top Overlay "2" at 41.298,55.748 h1.27 r90; Top Overlay "1" at 43.838,55.748 h1.27 r90; Top Overlay "19" at 43.838,82.672 h1.27 r90; Top Overlay "20" at 41.298,82.672 h1.27 r90
J23: Top Overlay "1" at 7.438,7.208 h1
J24: Top Overlay "1" at 134.44,80.3 h1
Q5: Top Overlay "G" at 124.747,14.048 h1; Top Overlay "S" at 132.698,14.074 h1; Top Overlay "D" at 128.735,18.062 h1
Q6: Top Overlay "D" at 151.155,18.062 h1; Top Overlay "S" at 155.118,14.074 h1; Top Overlay "G" at 147.167,14.048 h1